# Altium PCB STM32F103C8T6_PCB.PcbDoc (part 1 of 2)
Units mm, origin at the board's own origin, x right, y up, seen from the top; angles counter-clockwise.
Board outline 40 x 65.43 mm, 2 copper layers (Top Layer, Bottom Layer); 38 components, 50 nets, 176 pads, 35 vias.
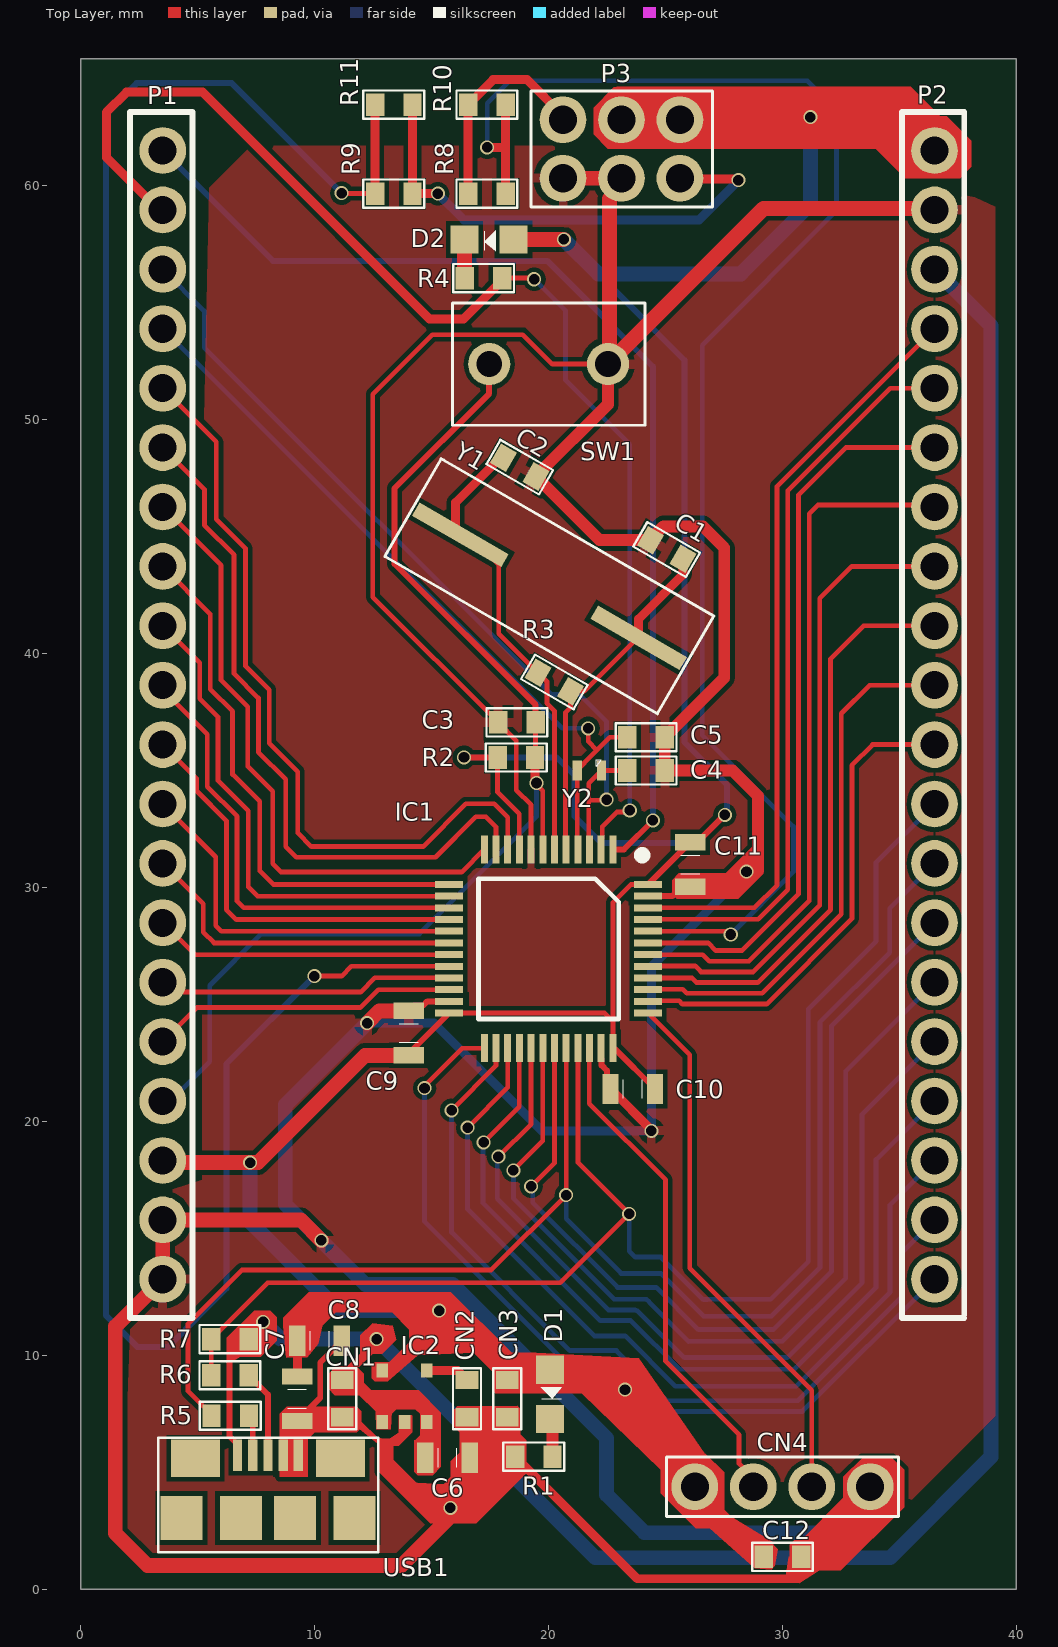
[diagram p0: Top Layer view]
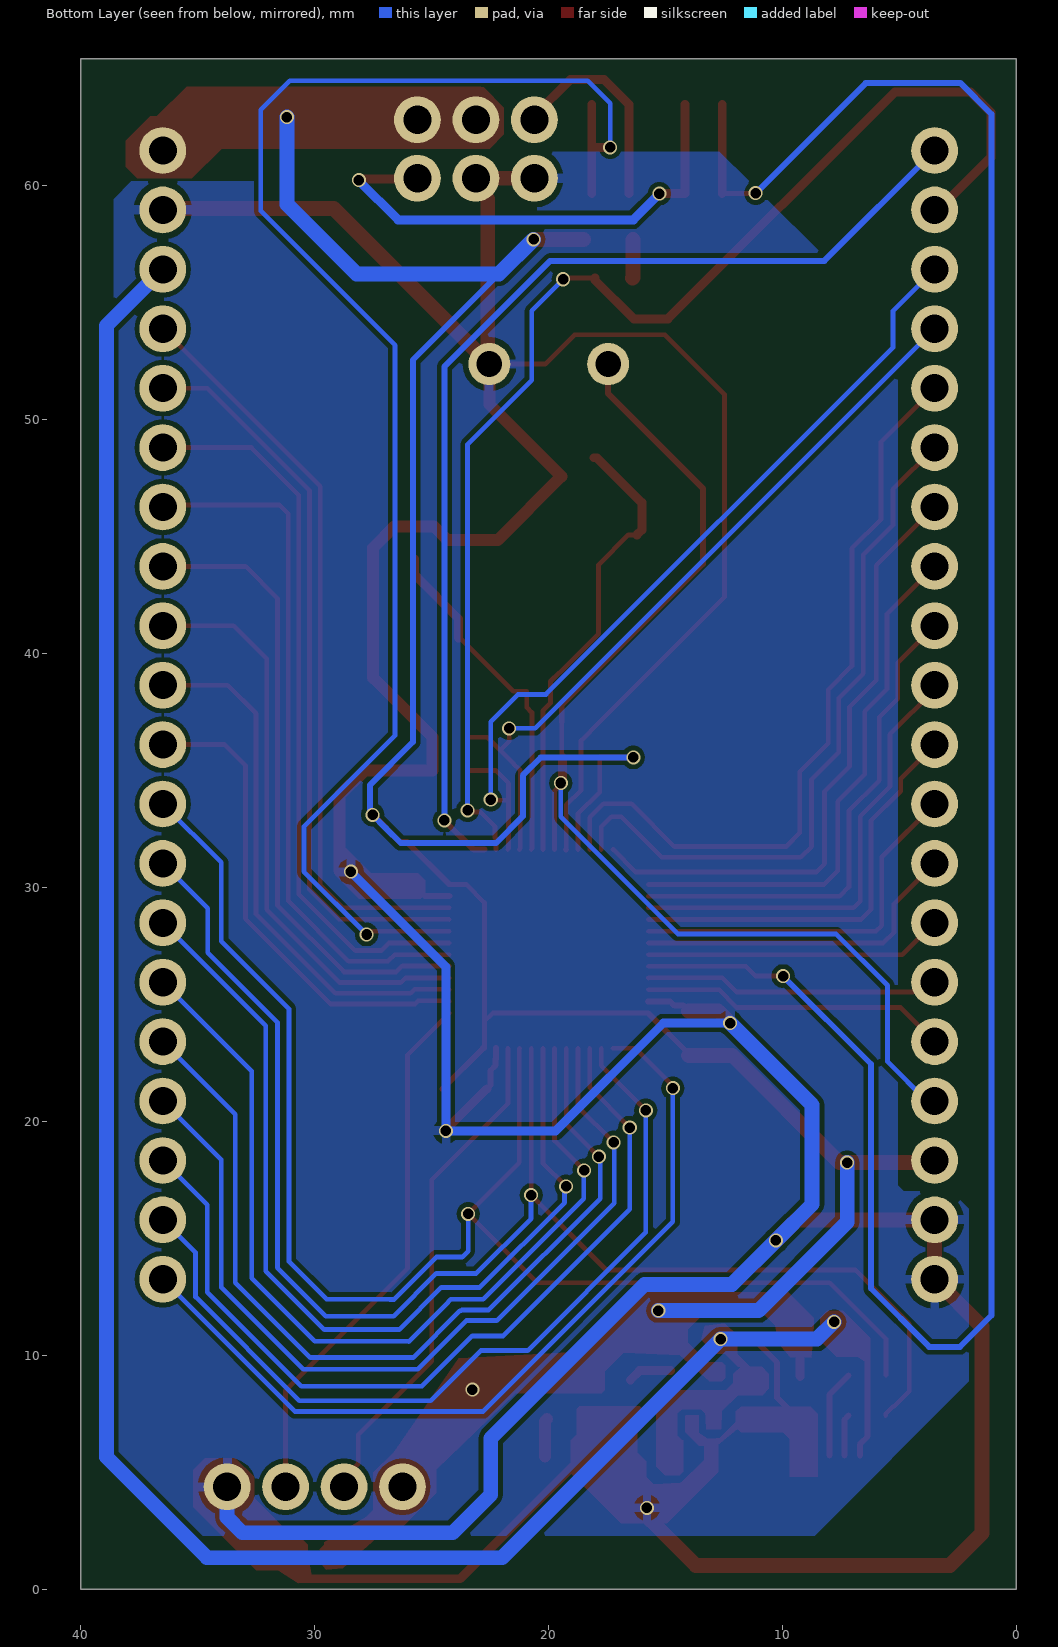
[diagram p1: Bottom Layer view, seen from below]
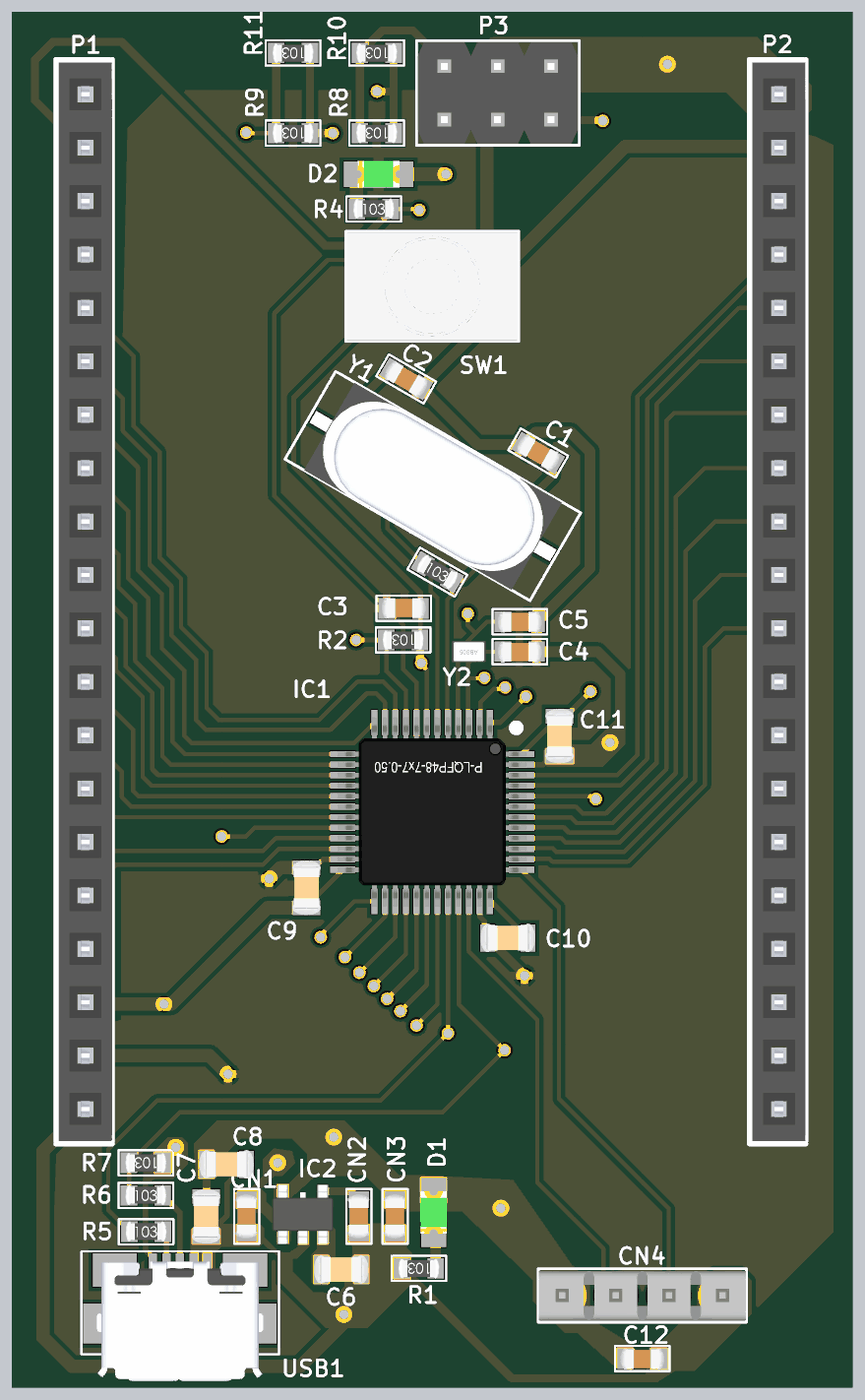
[diagram p2: 3D render of the assembled board from above, using the file's embedded part models]

## Layer stack, top to bottom
Top Solder: solder mask 0.0254, Solder Resist, Dk 3.5
Top Layer: signal copper 0.0356
Dielectric 1: dielectric 0.32, FR-4, Dk 4.8
Bottom Layer: signal copper 0.0356
Bottom Solder: solder mask 0.0254, Solder Resist, Dk 3.5

## Board outline
0,0 0,65.43 40.005,65.43 40.005,0

## Design rules (kind name [scope] priority, off if disabled: settings)
Clearance [All] p1: gap=0.203 ignorepadtopadclearanceinfootprint=TRUE except(0.229: Arc-Hole Track-Hole SMDPad-Hole THPad-Hole Via-Hole Fill-Hole Poly-Hole Region-Hole; 0.254: Arc-Arc Arc-Track Arc-THPad Arc-Via Arc-Text Track-Track Track-THPad Track-Via Track-Text SMDPad-Via SMDPad-Text THPad-Via THPad-Text Via-Via Via-Text Fill-Text Poly-Text Region-Text Text-Text Text-Hole)
DiffPairsRouting [All] p1: maxlimit=0.254 minlimit=0.254 mostfreqgap=0.254 toplayer_minwidth=0.407 toplayer_maxwidth=0.407 toplayer_prefwidth=0.407 bottomlayer_minwidth=0.407 bottomlayer_maxwidth=0.407 bottomlayer_prefwidth=0.407 impedanceprofiledriven=TRUE impedanceprofileid={79735D76-20AD-48B5-84A6-73A93A1C253D} impedanceprofilevalue=90.000000 maxuncoupledlength=12.7
MinimumSolderMaskSliver [All] p1: minsoldermaskwidth=0.127
PlaneClearance [All] p1: clearance=0.762
PlaneConnect [All] p1: planeconnectstyle=Relief reliefexpansion=0.381 reliefentries=4 reliefconductorwidth=0.381 reliefairgap=0.254
PolygonConnect [All] p1: connectstyle=Relief reliefconductorwidth=0.381 reliefentries=4 polygonreliefangle="90 Angle" airgapwidth=0.254
RoutingVias [All] p1: holewidth=0.3 width=0.5 viastyle="Through Hole" minholewidth=0.25 minwidth=0.4 maxholewidth=0.5 maxwidth=1
SMDToCorner [All] p1: distance=50000
SMDToPlane [All] p1: distance=50000
SilkToSilkClearance [All] p1 off: silktosilkclearance=0
SilkToSolderMaskClearance [IsPad] p1 off: minsilkscreentomaskgap=0.127 clearancetoexposedcopper=TRUE
SolderMaskExpansion [All] p1: expansion=0.102 istentingtop=FALSE
Width [All] p1: maxlimit=1.778 minlimit=0.203 preferedwidth=0.279 minimp=50.000000 maximp=50.000000 favimp=50.000000
24 further rules are at their usual default settings.

## Components (designator, comment, footprint, x,y, rotation, side; value= is the part's Value field where it differs from the comment)
C1 "CAP CER 20PF 50V C0G/NP0 0603" 0603_CAP 25.044,44.45 r330 top
C2 "CAP CER 20PF 50V C0G/NP0 0603" 0603_CAP 18.763,47.974 r150 top
C3 "CAP CER 10nF 50V X7R 0603" 0603_CAP 18.644,37.059 r0 top
C4 "CAP CER 20PF 50V C0G/NP0 0603" 0603_CAP 24.168,35.001 r180 top
C5 "CAP CER 20PF 50V C0G/NP0 0603" 0603_CAP 24.168,36.424 r180 top
C6 "CAP CER 1UF 0805" CAP_0805 15.672,5.618 r180 top
C7 "CAP CER 1UF 0805" CAP_0805 9.246,8.142 r90 top
C8 "CAP CER 100uf MLCC" CAP_0805 10.211,10.617 r180 top
C9 "CAP CER 100uf MLCC" CAP_0805 14.021,23.774 r270 top
C10 "CAP CER 100uf MLCC" CAP_0805 23.597,21.387 r0 top
C11 "CAP CER 100uf MLCC" CAP_0805 26.06,30.988 r90 top
C12 "CAP CER 10nF 50V X7R 0603" 0603_CAP 30,1.38 r180 top
CN1 "C0603 0.1uf" 0603_CAP 11.176,8.142 r90 top
CN2 "C0603 0.1uf" 0603_CAP 16.51,8.142 r90 top
CN3 "C0603 0.1uf" 0603_CAP 18.237,8.142 r90 top
CN4 "CONN HDR STRIP SOLDER 4POS GOLD" "4 PIN KONNEKTOR PIN" 30,4.38 r0 top
D1 "LED GREEN CLEAR CHIP SMD" 0805_LED_GREEN 20.066,8.331 r270 top
D2 "LED GREEN CLEAR CHIP SMD" 0805_LED_GREEN 17.45,57.709 r180 top
IC1 "IC MCU 32BIT 64KB FLASH 48LQFP" LQFP48 20,27.38 r180 top
IC2 "IC REG LINEAR 3.3V 300MA SOT23-5" SOT23-5 13.843,8.242 r180 top
P1 "CONN SIL HDR MALE PIN 20POS TIN" 20pin1x20_header_connector 3.5,37.38 r270 top
P2 "CONN SIL HDR MALE PIN 20POS TIN" 20pin1x20_header_connector 36.5,37.38 r270 top
P3 "header3x2" HEADER3X2 23.114,61.575 r180 top
R1 "100R" 0603_RES 19.366,5.668 r180 top
R2 "RES 10K OHM 0.5% 1/10W 0603" 0603_RES 18.618,35.56 r180 top
R3 "RES 560K OHM 5% 1/10W 0603" 0603_RES 20.244,38.786 r330 top
R4 "100R" 0603_RES 17.221,56.058 r0 top
R5 "*RES 20 OHM 5% 1/10W 0603" 0603_RES 6.388,7.417 r0 top
R6 "*RES 20 OHM 5% 1/10W 0603" 0603_RES 6.375,9.144 r0 top
R7 "RES 4.7K OHM 5% 1/10W 0603" 0603_RES 6.375,10.693 r180 top
R8 "RES 220K OHM 5% 1/10W 0603" 0603_RES 17.361,59.669 r180 top
R9 "RES 220K OHM 5% 1/10W 0603" 0603_RES 13.381,59.669 r180 top
R10 "RES 220K OHM 5% 1/10W 0603" 0603_RES 17.361,63.475 r180 top
R11 "RES 220K OHM 5% 1/10W 0603" 0603_RES 13.381,63.475 r180 top
SW1 "push button switch" PUSH_BUTTON 20,52.38 r0 top
USB1 "CONN RCPT USB2.0 MICRO B SMD R/A" "MICRO B USB2.0 SMD R/A" 8,4.38 r0 top
Y1 "CRYSTAL 8.0000MHZ 18PF SMD" "USX SMD T_8MHZ CRYSTAL" 20.041,42.875 r150 top
Y2 "CRYSTAL 32.7680KHZ 12.5PF SMD" "2-SMD_CRYSTAL 32.7680KHZ" 21.742,35.004 r180 top

## Footprints (in the part's own frame and the unit in brackets; to place one, negate y for a bottom-side part, rotate by r counter-clockwise, add the part's x,y. Pads: shape width x height; smd on the part's side, far side on the other; paste and mask are expansions set on the pad)
"2-SMD_CRYSTAL 32.7680KHZ" [mm]
  rect 0.4x0.86 smd mask+0.05: 1(-0.52,0) 2(0.52,0)
  silkscreen extent -0.51,-0.46 -0.3,-0.19, body extent -0.8,-0.5 0.8,0.5, height 0.5
"4 PIN KONNEKTOR PIN" [mm]
  round 2 hole 1.2 mask+0.102: 1(-3.75,0) 2(-1.25,0) 3(1.25,0) 4(3.75,0)
  silkscreen extent -4.95,-1.27 4.95,1.27, body extent -4.93,-1.17 4.93,1.17, height 10.43
20pin1x20_header_connector [mm]
  round 2 hole 1.2 mask+0.102: 1(-24.13,0) 2(-21.59,0) 3(-19.05,0) 4(-16.51,0) 5(-13.97,0) 6(-11.43,0) 7(-8.89,0) 8(-6.35,0) 9(-3.81,0) 10(-1.27,0) 11(1.27,0) 12(3.81,0) 13(6.35,0) 14(8.89,0) 15(11.43,0) 16(13.97,0) 17(16.51,0) 18(19.05,0) 19(21.59,0) 20(24.13,0)
  silkscreen extent -25.78,-1.4 25.78,1.27, body extent -25.65,-1.27 25.65,1.27, height 8.69
0603_CAP [mil]
  rect 31x38 smd mask+1.97: 1(-31.5,0) 2(31.5,0)
  silkscreen extent -51,-24 51,24, body extent -41,-20 41,21, height 31
0603_RES [mil]
  rect 31x38 smd mask+1.97: 1(-31.5,0) 2(31.5,0)
  silkscreen extent -51,-24 51,24, body extent -39,-19 39,20, height 17
0805_LED_GREEN [mm]
  rect 1.2x1.2 smd mask+0.05: 1(1.05,0) 2(-1.05,0)
  silkscreen extent -0.3,-0.4 0.2,0.5, body extent -1,-0.62 1,0.63, height 1.1
CAP_0805 [mm]
  rect 0.7x1.3 smd mask+0.05: 1(-0.95,0) 2(0.95,0)
  silkscreen extent -0.4,-0.4 0.4,0.4, body extent -1.3,-0.68 1.3,0.68, height 0.9
HEADER3X2 [mm]
  round 2 hole 1.2 mask+0.102: 1(-2.5,-1.25) 2(0,-1.25) 3(2.5,-1.25) 4(-2.5,1.25) 5(0,1.25) 6(2.5,1.25)
  silkscreen extent -3.89,-2.49 3.86,2.49, body extent -3.81,-2.41 3.81,2.41, height 8.49
LQFP48 [mm] "7 x 7 mm"
  rect 0.3x1.2 smd mask+0.05: 1(-2.75,-4.25) 2(-2.25,-4.25) 3(-1.75,-4.25) 4(-1.25,-4.25) 5(-0.75,-4.25) 6(-0.25,-4.25) 7(0.25,-4.25) 8(0.75,-4.25) 9(1.25,-4.25) 10(1.75,-4.25) 11(2.25,-4.25) 12(2.75,-4.25) 25(2.75,4.25) 26(2.25,4.25) 27(1.75,4.25) 28(1.25,4.25) 29(0.75,4.25) 30(0.25,4.25) 31(-0.25,4.25) 32(-0.75,4.25) 33(-1.25,4.25) 34(-1.75,4.25) 35(-2.25,4.25) 36(-2.75,4.25)
  rect 1.2x0.3 smd mask+0.05: 13(4.25,-2.75) 14(4.25,-2.25) 15(4.25,-1.75) 16(4.25,-1.25) 17(4.25,-0.75) 18(4.25,-0.25) 19(4.25,0.25) 20(4.25,0.75) 21(4.25,1.25) 22(4.25,1.75) 23(4.25,2.25) 24(4.25,2.75) 37(-4.25,2.75) 38(-4.25,2.25) 39(-4.25,1.75) 40(-4.25,1.25) 41(-4.25,0.75) 42(-4.25,0.25) 43(-4.25,-0.25) 44(-4.25,-0.75) 45(-4.25,-1.25) 46(-4.25,-1.75) 47(-4.25,-2.25) 48(-4.25,-2.75)
  silkscreen extent -4.1,-4.1 3,3, body extent -4.5,-4.5 4.5,4.5, height 1.43
"MICRO B USB2.0 SMD R/A" [mm]
  rect 0.4x1.35 smd mask+0.05: 1(-1.3,1.338) 2(-0.65,1.338) 3(0,1.338) 4(0.65,1.338) 5(1.3,1.338)
  rect 2.1x1.6 smd mask+0.05: 6(-3.1,1.213) 7(3.1,1.213)
  rect 1.8x1.9 smd mask+0.05: 8(-3.7,-1.338) 9(3.7,-1.338) 10(-1.15,-1.338) 11(1.15,-1.338)
  silkscreen extent -4.69,-2.8 4.71,2.1, body extent -3.96,-4.06 3.96,1.61, height 2.7
PUSH_BUTTON [mm]
  round 1.8 hole 1.1 mask+0.05: 1(-2.54,0) 2(2.54,0)
  silkscreen extent -4.11,-2.62 4.11,2.62, body extent -4.06,-2.54 4.07,2.54, height 19.1
SOT23-5 [mm]
  rect 0.5x0.6 smd mask+0.05: 1(0.95,1.1) 2(0,1.1) 3(-0.95,1.1) 4(-0.95,-1.1) 5(0.95,-1.1)
  body extent -1.45,-1.4 1.45,1.4, height 1.2
"USX SMD T_8MHZ CRYSTAL" [mm]
  rect 4.4x0.65 smd mask+0.05: 1(-4.4,0) 2(4.4,0)
  silkscreen extent -6.72,-2.41 6.74,2.41, body extent -6.6,-2.39 6.6,2.41, height 4.43

## Part data
C1 C2 C4 C5: Capacitance=20pF, Case Code (Metric)=1608, Case Code (Imperial)=0603, Dielectric=C0G, Manufacturer=Samsung, Manufacturer Part Number=CL10C200JB8NNNC, Max Operating Temperature=125°C, Min Operating Temperature=-55°C, Package Quantity=1, Supplier Part Number 1=1276-1187-1-ND, Temperature Coefficient=300ppm/°C, Tolerance=5%, Voltage=50V, Case/Package=0603, Category="Ceramic Capacitors", ComponentLink1Description=https://datasheet.ciiva.com/26877/getdatasheetpartid-640634-26877974.pdf?src-supplier=Verical, ComponentLink1URL=https://datasheet.ciiva.com/26877/getdatasheetpartid-640634-26877974.pdf?src-supplier=Verical, ComponentLink2Description=https://datasheet.ciiva.com/26310/mlcc-catalogdownload2013-eng-26310315.pdf?src-supplier=Distrelec, ComponentLink2URL=https://datasheet.ciiva.com/26310/mlcc-catalogdownload2013-eng-26310315.pdf?src-supplier=Distrelec, Construction=Flat, Depth=0.8mm, Designer=Dogukan, Height=0.8mm, Length=1.6mm, Mount="Surface Mount", Packaging="Tape and Reel", Pricing 1="1=0,1, 10=0,044, 50=0,0238, 100=0,0194, 500=0,01386, 1000=0,01089 (USD)", Radiation Hardening=No, RoHS=Yes, RoHS Compliant=Yes, Series=CL, Stock 1=464918, Supplier 1=Digi-Key, Thickness=0.035inch, Voltage Rating=50V, Width=0.031inch
C3 C12: "Cap Ceramic 0.01uF 50V X7R 5% SMD 0603 125C Paper T/R", Capacitance=10nF, Case Code (Metric)=1608, Case Code (Imperial)=0603, Dielectric=X7R, Manufacturer=Yageo, Manufacturer Part Number=CC0603JPX7R9BB103, Max Operating Temperature=125°C, Min Operating Temperature=-55°C, Supplier Part Number 1=13-CC0603JPX7R9BB103CT-ND, Tolerance=5%, Voltage Rating (DC)=50V, Case/Package=0603, Category="Ceramic Capacitors", ComponentLink1Description=http://www.mouser.com/ds/2/447/UPY-GPHC_X7R_6.3V-to-50V_10-595240.pdf?src-supplier=Mouser, ComponentLink1URL=http://www.mouser.com/ds/2/447/UPY-GPHC_X7R_6.3V-to-50V_10-595240.pdf?src-supplier=Mouser, Designer=Dogukan, Halogen Free="Halogen Free", Lead Free="Lead Free", Packaging="Tape and Reel", Pricing 1="1=0,1, 10=0,048, 50=0,0262, 100=0,0214, 500=0,0153, 1000=0,01203, 2500=0,01093, 5000=0,01006 (USD)", RoHS=Yes, RoHS Compliant=Yes, Stock 1=51472, Supplier 1=Digi-Key, Termination=SMD/SMT, Weight=7.1E-05oz
C6 C7: "CAP CER 1UF 50V X7R 0805", Capacitance=1uF, Case Code (Metric)=2012, Case Code (Imperial)=0805, Dielectric=X7R, Manufacturer=Samsung, Manufacturer Part Number=CL21B105KBFNNNE, Max Operating Temperature=125°C, Min Operating Temperature=-55°C, Package Quantity=1, Supplier Part Number 1=1276-1029-1-ND, Tolerance=10%, Voltage=50V, Case/Package=0805, Category="Ceramic Capacitors", ComponentLink1Description=https://datasheet.ciiva.com/25800/cl21b105kbfnnne-25800291.pdf?src-supplier=Digi-Key, ComponentLink1URL=https://datasheet.ciiva.com/25800/cl21b105kbfnnne-25800291.pdf?src-supplier=Digi-Key, Construction=Flat, Depth=1.25mm, Designer=Dogukan, Height=1.25mm, Length=2mm, Mount="Surface Mount", Packaging="Tape and Reel", Pricing 1="1=0,11, 10=0,079, 50=0,045, 100=0,0373, 500=0,02616, 1000=0,02165 (USD)", Radiation Hardening=No, RoHS=Yes, RoHS Compliant=Yes, Series=CL, Stock 1=145892, Supplier 1=Digi-Key, Thickness=0.053inch, Voltage Rating=50V, Width=0.049inch
C8 C9 C10 C11: "Cap 100UF 4VDC Z6S 20% SMD 0805 Embossed Tape", Capacitance=100uF, Dielectric=X6S, Manufacturer=Murata, Manufacturer Part Number=GRM21BC80G107ME15K, Supplier Part Number 1=490-GRM21BC80G107ME15KCT-ND, Tolerance=20%, Voltage Rating (DC)=4V, Category="Ceramic Capacitors", Designer=Dogukan, Length=2mm, Pricing 1="1=0,94, 10=0,715, 50=0,5938, 100=0,5114, 500=0,3959, 1000=0,34092, 2500=0,31892, 5000=0,30243 (USD)", RoHS=Yes, RoHS Compliant=Yes, Stock 1=76129, Supplier 1=Digi-Key, Thickness=1.25mm, Width=1.25mm
CN1 CN2 CN3: "Multilayer Ceramic Capacitors (MLCC) - SMD/SMT 50volts 0.1uF X7R 10%", Capacitance=100nF, Case/Package=0603, Dielectric=X7R, Manufacturer=KEMET, Manufacturer Part Number=C0603C104K5RACTU, Max Operating Temperature=125°C, Min Operating Temperature=-55°C, Supplier Part Number 1=399-C0603C104K5RAC7867CT-ND, Tolerance=10%, Voltage=50V, Category="Ceramic Capacitors", Designer=Dogukan, Length=0.063inch, Mount="Surface Mount", Packaging="Tape and Reel", Pricing 1="1=0,11, 10=0,078, 50=0,0424, 100=0,0346, 500=0,02474, 1000=0,01944 (USD)", RoHS=Yes, RoHS Compliant=Yes, Series="SMD Comm X7R", Stock 1=9369813, Supplier 1=Digi-Key, Thickness=0.034inch, Voltage Rating=50V, Width=0.031inch
CN4: library part "KONNEKTOR 4POS", "Headers & Wire Housings Low Profile RT Angle Solder Cup Header", Manufacturer=Mill-Max, Manufacturer Part Number=380-10-104-10-003000, Supplier Part Number 1=ED10093-ND, Category=Connectors, ComponentLink1Description=https://www.mill-max.com/assets/pdfs/047.2.PDF?src-supplier=Digi-Key, ComponentLink1URL=https://www.mill-max.com/assets/pdfs/047.2.PDF?src-supplier=Digi-Key, ComponentLink2Description=https://datasheet.octopart.com/380-10-104-10-003000-Mill-Max-datasheet-155418866.pdf?src-supplier=Sager+Electronics, ComponentLink2URL=https://datasheet.octopart.com/380-10-104-10-003000-Mill-Max-datasheet-155418866.pdf?src-supplier=Sager+Electronics, Designer=Dogukan, Pricing 1="1=6,26, 10=5,684, 100=5,0076, 500=4,25644, 1000=3,6305 (USD)", RoHS=No, Stock 1=609, Supplier 1=Digi-Key
D1 D2: "Green 569nm LED Indication - Discrete 2.1V 0805 (2012 Metric)", Case Code (Metric)=2012, Case Code (Imperial)=0805, Color=Green, Forward Current=30mA, Forward Voltage=2.1V, Lens Color=Colorless, Manufacturer="Vishay Lite-On", Manufacturer Part Number=LTST-C171GKT, Max Operating Temperature=85°C, Min Operating Temperature=-55°C, Package Quantity=3000, Power Dissipation=100mW, Reverse Voltage=5V, Supplier Part Number 1=160-1423-1-ND, Test Current=10mA, Case/Package=0805, Category=LEDs, ComponentLink1Description=https://datasheet.ciiva.com/11773/0900766b80dc0296-11773991.pdf?src-supplier=Rs, ComponentLink1URL=https://datasheet.ciiva.com/11773/0900766b80dc0296-11773991.pdf?src-supplier=Rs, ComponentLink2Description=https://datasheet.ciiva.com/2110/ltst-c171gkt-2110000.pdf?src-supplier=Digi-Key, ComponentLink2URL=https://datasheet.ciiva.com/2110/ltst-c171gkt-2110000.pdf?src-supplier=Digi-Key, ComponentLink3Description=https://datasheet.ciiva.com/12400/lite-on-ltst-c171gkt-190133-12400647.pdf?src-supplier=Mouser, ComponentLink3URL=https://datasheet.ciiva.com/12400/lite-on-ltst-c171gkt-190133-12400647.pdf?src-supplier=Mouser, ComponentLink4Description=https://datasheet.ciiva.com/2110/ltst-c171gkt-2110001.pdf?src-supplier=Digi-Key, ComponentLink4URL=https://datasheet.ciiva.com/2110/ltst-c171gkt-2110001.pdf?src-supplier=Digi-Key, ComponentLink5Description=https://datasheet.ciiva.com/2110/ltst-c171gkt-2110002.pdf?src-supplier=Digi-Key, ComponentLink5URL=https://datasheet.ciiva.com/2110/ltst-c171gkt-2110002.pdf?src-supplier=Digi-Key, ComponentLink6Description=https://datasheet.ciiva.com/16396/ltst-c171gkt-16396549.pdf?src-supplier=Future+Electronics, ComponentLink6URL=https://datasheet.ciiva.com/16396/ltst-c171gkt-16396549.pdf?src-supplier=Future+Electronics, Depth=1.25mm, Designer=Dogukan, Dominant Wavelength=569nm, Height=0.9mm, Lead Free="Lead Free", Length=2mm, Lens Size=1.25mm, Lens Style=Flat,Diffused,Colorless,Rectangular,Clear, Lens Transparency=Clear, Luminous Intensity=12mcd, Mount="Surface Mount", Number of Elements=1, Number of LEDs=1, Number of Pins=2, Packaging="Tape and Reel", Power Rating=100mW, Pricing 1="1=0,26, 10=0,143, 100=0,0663, 500=0,0612, 1000=0,04794 (USD)", Radiation Hardening=No, RoHS=Yes, RoHS Compliant=Yes, Series=-, Stock 1=213944, Supplier 1=Digi-Key, Viewing Angle=130°, Wavelength=585nm, Width=1.25mm, Illumination Color=Green
IC1: library part STM32F103C8T6, "ARM Cortex-M3 STM32 F1 Microcontroller 32-Bit 72MHz 64kB FLASH LQFP48 STM32F103C8T6", Manufacturer=STMicroelectronics, Supplier Part Number 1=497-6063-ND, Category=Microcontrollers, ComponentLink1Description=https://datasheet.ciiva.com/8054/1730126-8054942.pdf?src-supplier=Element14, ComponentLink1URL=https://datasheet.ciiva.com/8054/1730126-8054942.pdf?src-supplier=Element14, ComponentLink2Description=https://datasheet.ciiva.com/14100/pustm-arm-microcont-stm32f103-en-14100508.pdf?src-supplier=Distrelec, ComponentLink2URL=https://datasheet.ciiva.com/14100/pustm-arm-microcont-stm32f103-en-14100508.pdf?src-supplier=Distrelec, Designer=Dogukan, Manufacturer Part Number=STM32F103C8T6, Pricing 1="1=6,42, 25=5,5256, 100=4,7979, 500=4,17798, 2500=3,5672 (USD)", RoHS=Yes, Supplier 1=Digi-Key
IC2: library part "Voltage Regulator_5V->3.3V", "IC REG LDO 3.3V 0.3A SOT23-5", Manufacturer=Richtek, Manufacturer Part Number=RT9193-33GB, Supplier Part Number 1=1028-1014-1-ND, Category="Voltage Regulator", ComponentLink1Description=https://datasheet.ciiva.com/2046/3d3futf-83fb3frfm5mtkzlte2lnbkzg3d3d3f3d-2046896.pdf?src-supplier=Digi-Key, ComponentLink1URL=https://datasheet.ciiva.com/2046/3d3futf-83fb3frfm5mtkzlte2lnbkzg3d3d3f3d-2046896.pdf?src-supplier=Digi-Key, ComponentLink2Description=https://datasheet.ciiva.com/28652/1782157-28652989.pdf?src-supplier=Element14, ComponentLink2URL=https://datasheet.ciiva.com/28652/1782157-28652989.pdf?src-supplier=Element14, Designer=Dogukan, Pricing 1="1=0,55, 10=0,468, 25=0,4368, 100=0,3494, 250=0,32448, 500=0,27456, 1000=0,21216 (USD)", RoHS=Yes, Stock 1=15060, Supplier 1=Digi-Key
P1 P2: library part header_20pin, "2.54mm (0.1\") Pitch SIL Vertical Through Connect Header Strip, tin (hi-temp mould), 20 contacts", Manufacturer=Harwin, Manufacturer Part Number=D01-9922046, Supplier Part Number 1=952-1900-ND, Category="Headers and Wire Housings", ComponentLink1Description=https://datasheet.ciiva.com/9479/d01-992-9479968.pdf?src-supplier=Avnet, ComponentLink1URL=https://datasheet.ciiva.com/9479/d01-992-9479968.pdf?src-supplier=Avnet, ComponentLink2Description=https://datasheet.ciiva.com/11747/0900766b8078dcb7-11747631.pdf?src-supplier=Rs, ComponentLink2URL=https://datasheet.ciiva.com/11747/0900766b8078dcb7-11747631.pdf?src-supplier=Rs, ComponentLink3Description=https://datasheet.ciiva.com/7639/111680-7639719.pdf?src-supplier=Element14, ComponentLink3URL=https://datasheet.ciiva.com/7639/111680-7639719.pdf?src-supplier=Element14, ComponentLink4Description=https://datasheet.ciiva.com/6783/d01-992-6783401.pdf?src-supplier=Digi-Key, ComponentLink4URL=https://datasheet.ciiva.com/6783/d01-992-6783401.pdf?src-supplier=Digi-Key, Designer=Dogukan, Pricing 1="1=4,9, 100=3,1066, 500=2,6656, 2500=2,37161 (USD)", RoHS=Yes, Stock 1=1140, Supplier 1=Digi-Key
R1 R4: library part RES_100R_0603, "Res Thick Film 0603 100 Ohm 1% 1/10W ±100ppm/°C Molded SMD Paper T/R", Case Code (Metric)=1608, Case Code (Imperial)=0603, Manufacturer=Yageo, Manufacturer Part Number=RC0603FR-07100RL, Max Operating Temperature=155°C, Max Power Dissipation=100mW, Min Operating Temperature=-55°C, Resistance Tolerance=1%, Resistor Type="Thick Film", Supplier Part Number 1=311-100HRDKR-ND, Temperature Coefficient=100ppm/°C, Voltage Rating=50V, Case/Package=0603, Category="Chip SMD Resistors", ComponentLink1Description=https://datasheet.ciiva.com/7660/38590-7660788.pdf?src-supplier=Element14, ComponentLink1URL=https://datasheet.ciiva.com/7660/38590-7660788.pdf?src-supplier=Element14, ComponentLink2Description=https://datasheet.ciiva.com/11808/0900766b80f96399-11808280.pdf?src-supplier=Rs, ComponentLink2URL=https://datasheet.ciiva.com/11808/0900766b80f96399-11808280.pdf?src-supplier=Rs, ComponentLink3Description=https://datasheet.ciiva.com/22747/443971-22747518.pdf?src-supplier=Element14, ComponentLink3URL=https://datasheet.ciiva.com/22747/443971-22747518.pdf?src-supplier=Element14, ComponentLink4Description=https://datasheet.ciiva.com/46440/1868787-46440890.pdf?src-supplier=Element14, ComponentLink4URL=https://datasheet.ciiva.com/46440/1868787-46440890.pdf?src-supplier=Element14, ComponentLink5Description=https://datasheet.ciiva.com/7746/1738695-7746238.pdf?src-supplier=Element14, ComponentLink5URL=https://datasheet.ciiva.com/7746/1738695-7746238.pdf?src-supplier=Element14, ComponentLink6Description=https://datasheet.ciiva.com/7746/1738695-7746237.pdf?src-supplier=Element14, ComponentLink6URL=https://datasheet.ciiva.com/7746/1738695-7746237.pdf?src-supplier=Element14, Construction=Rectangular, Depth=0.8mm, Designer=Dogukan, Features="Moisture Resistant", Height=0.45mm, Lead Free="Lead Free", Length=1.6mm, Military Standard=Not, Number of Pins=2, Number of Terminations=2, Packaging="Tape and Reel", Power Rating=100mW, Pricing 1="1=0,1, 10=0,018, 50=0,0106, 100=0,0088, 500=0,00592, 1000=0,00505 (USD)", Reach SVHC Compliant=Unknown, Resistance=100R, RoHS=Yes, RoHS Compliant=Yes, Series=RC, Size Code=0603, Stock 1=7267655, Supplier 1=Digi-Key, Technology="THICK FILM", Termination=SMD/SMT, Tolerance=1%, Voltage Rating (DC)=50V, Width=0.8mm
R2: "Res Thin Film 0603 10K Ohm 0.5% 1/10W ±25ppm/°C Molded SMD Paper T/R", Case Code (Metric)=1608, Case Code (Imperial)=0603, Manufacturer=Yageo, Manufacturer Part Number=RT0603DRD0710KL, Max Operating Temperature=155°C, Max Power Dissipation=100mW, Min Operating Temperature=-55°C, Resistance=10kR, Supplier Part Number 1=311-10KDCT-ND, Temperature Coefficient=25ppm/°C, Tolerance=0.5%, Voltage Rating (DC)=50V, Case/Package=0603, Category="Chip SMD Resistors", ComponentLink1Description=http://www.yageo.com/documents/recent/PYu-RT_1-to-0.01_RoHS_L_9.pdf?src-supplier=Digi-Key, ComponentLink1URL=http://www.yageo.com/documents/recent/PYu-RT_1-to-0.01_RoHS_L_9.pdf?src-supplier=Digi-Key, ComponentLink2Description=http://www.yageo.com/documents/recent/PYu-RT_1-to-0.05_RoHS_L_(4).pdf?src-supplier=Future+Electronics, ComponentLink2URL=http://www.yageo.com/documents/recent/PYu-RT_1-to-0.05_RoHS_L_(4).pdf?src-supplier=Future+Electronics, Designer=Dogukan, Lead Free="Lead Free", Number of Terminations=2, Packaging="Cut Tape", Power Rating=100mW, Pricing 1="1=0,18, 10=0,151, 100=0,0592, 500=0,0358, 1000=0,02478, 2500=0,02271 (USD)", RoHS=Yes, RoHS Compliant=Yes, Series=RT, Size Code=0603, Stock 1=1584873, Supplier 1=Digi-Key, Width=800um
R3: "Res Thick Film 0603 560K Ohm 5% 0.1W(1/10W) ±100ppm/C Molded SMD Paper T/R", Case Code (Metric)=1608, Case Code (Imperial)=0603, Manufacturer=Yageo, Manufacturer Part Number=RC0603JR-07560KL, Max Operating Temperature=155°C, Max Power Dissipation=100mW, Min Operating Temperature=-55°C, Package Quantity=1, Resistance=560kR, Resistance Tolerance=5%, Resistor Type="Thick Film", Supplier Part Number 1=311-560KGRCT-ND, Temperature Coefficient=100ppm/°C, Voltage Rating=75V, Voltage Rating (DC)=50V, Case/Package=0603, Category="Chip SMD Resistors", ComponentLink1Description=https://datasheet.ciiva.com/2453/pyu-r-int-thick-7-2453056.pdf?src-supplier=Digi-Key, ComponentLink1URL=https://datasheet.ciiva.com/2453/pyu-r-int-thick-7-2453056.pdf?src-supplier=Digi-Key, ComponentLink2Description=https://datasheet.ciiva.com/2453/pyu-r-int-thick-7-2453057.pdf?src-supplier=Digi-Key, ComponentLink2URL=https://datasheet.ciiva.com/2453/pyu-r-int-thick-7-2453057.pdf?src-supplier=Digi-Key, ComponentLink3Description=https://datasheet.ciiva.com/2453/pyu-r-int-thick-7-2453055.pdf?src-supplier=Digi-Key, ComponentLink3URL=https://datasheet.ciiva.com/2453/pyu-r-int-thick-7-2453055.pdf?src-supplier=Digi-Key, Designer=Dogukan, Features="Moisture Resistant", Height=0.022inch, Lead Free="Lead Free", Length=0.063inch, Number of Pins=2, Number of Terminations=2, Packaging="Tape and Reel", Power Rating=100mW, Pricing 1="1=0,1, 10=0,014, 50=0,0088, 100=0,0073, 500=0,00486, 1000=0,00415 (USD)", Reach SVHC Compliant=Unknown, RoHS=Yes, RoHS Compliant=Yes, Series=RC, Stock 1=503891, Supplier 1=Digi-Key, Technology="THICK FILM", Termination=SMD/SMT, Tolerance=5%, Weight=7.1E-05oz, Width=0.8mm, Working Voltage=75V
R5 R6: library part "RES 20 OHM 5% 1/10W 0603", "Res Thick Film 0603 20 Ohm 5% 1/10W +/-100ppm/ßC Molded SMD Paper T/R", Manufacturer=Yageo, Manufacturer Part Number=RC0603JR-0720RL, Supplier Part Number 1=311-20GRCT-ND, Category="Chip SMD Resistors", ComponentLink1Description=https://datasheet.ciiva.com/2453/pyu-r-int-thick-7-2453211.pdf?src-supplier=Digi-Key, ComponentLink1URL=https://datasheet.ciiva.com/2453/pyu-r-int-thick-7-2453211.pdf?src-supplier=Digi-Key, ComponentLink2Description=https://datasheet.ciiva.com/2453/pyu-r-int-thick-7-2453212.pdf?src-supplier=Digi-Key, ComponentLink2URL=https://datasheet.ciiva.com/2453/pyu-r-int-thick-7-2453212.pdf?src-supplier=Digi-Key, ComponentLink3Description=https://datasheet.ciiva.com/2453/pyu-r-int-thick-7-2453213.pdf?src-supplier=Digi-Key, ComponentLink3URL=https://datasheet.ciiva.com/2453/pyu-r-int-thick-7-2453213.pdf?src-supplier=Digi-Key, Designer=Dogukan, Pricing 1="1=0,1, 10=0,014, 50=0,0088, 100=0,0073, 500=0,00486, 1000=0,00415 (USD)", R=20R, RoHS=Yes, Stock 1=1380627, Supplier 1=Digi-Key
R7: "Res General Purpose Thick Film 0603 4.7k Ohm 5% 1/10W ±100ppm/°C Molded Paper T/R", Case Code (Metric)=1608, Case Code (Imperial)=0603, Manufacturer=Yageo, Manufacturer Part Number=RC0603JR-074K7L, Max Operating Temperature=155°C, Max Power Dissipation=100mW, Min Operating Temperature=-55°C, Resistance=4.7kR, Resistance Tolerance=5%, Resistor Type="Thick Film", Supplier Part Number 1=311-4.7KGRCT-ND, Temperature Coefficient=100ppm/°C, Voltage Rating=50V, Case/Package=0603, Category="Chip SMD Resistors", ComponentLink1Description=https://datasheet.ciiva.com/46412/443971-46412858.pdf?src-supplier=Element14, ComponentLink1URL=https://datasheet.ciiva.com/46412/443971-46412858.pdf?src-supplier=Element14, Construction=Rectangular, Depth=0.8mm, Designer=Dogukan, Features="Moisture Resistant", Lead Free="Lead Free", Length=1.6mm, Military Standard=Not, Number of Pins=2, Number of Terminations=2, Packaging="Tape and Reel", Power Rating=100mW, Pricing 1="1=0,1, 10=0,014, 50=0,0088, 100=0,0073, 500=0,00486, 1000=0,00415 (USD)", Reach SVHC Compliant=No, RoHS=Yes, RoHS Compliant=Yes, Series=RC, Size Code=0603, Stock 1=7404081, Supplier 1=Digi-Key, Termination=SMD/SMT, Tolerance=5%, Voltage Rating (DC)=50V, Width=0.8mm
R8 R9 R10 R11: "Res Thick Film 0603 220K Ohm 5% 0.1W(1/10W) ±100ppm/C Pad SMD T/R", Case Code (Metric)=1608, Case Code (Imperial)=0603, Manufacturer=Yageo, Manufacturer Part Number=RC0603JR-07220KL, Max Operating Temperature=155°C, Max Power Dissipation=100mW, Min Operating Temperature=-55°C, Package Quantity=1, Resistance=220kR, Resistance Tolerance=5%, Resistor Type="Thick Film", Supplier Part Number 1=311-220KGRCT-ND, Temperature Coefficient=100ppm/°C, Voltage Rating=50V, Case/Package=0603, Category="Chip SMD Resistors", ComponentLink1Description=https://datasheet.ciiva.com/2452/pyu-r-int-thick-7-2452925.pdf?src-supplier=Digi-Key, ComponentLink1URL=https://datasheet.ciiva.com/2452/pyu-r-int-thick-7-2452925.pdf?src-supplier=Digi-Key, ComponentLink2Description=https://datasheet.ciiva.com/2452/pyu-r-int-thick-7-2452923.pdf?src-supplier=Digi-Key, ComponentLink2URL=https://datasheet.ciiva.com/2452/pyu-r-int-thick-7-2452923.pdf?src-supplier=Digi-Key, ComponentLink3Description=https://datasheet.ciiva.com/2452/pyu-r-int-thick-7-2452924.pdf?src-supplier=Digi-Key, ComponentLink3URL=https://datasheet.ciiva.com/2452/pyu-r-int-thick-7-2452924.pdf?src-supplier=Digi-Key, Construction=Rectangular, Depth=0.8mm, Designer=Dogukan, Features="Moisture Resistant", Height=0.022inch, Lead Free="Lead Free", Length=0.063inch, Military Standard=Not, Number of Pins=2, Number of Terminations=2, Packaging="Tape and Reel", Power Rating=100mW, Pricing 1="1=0,1, 10=0,014, 50=0,0088, 100=0,0073, 500=0,00486, 1000=0,00415 (USD)", Reach SVHC Compliant=No, RoHS=Yes, RoHS Compliant=Yes, Series=RC, Size Code=0603, Stock 1=1084932, Supplier 1=Digi-Key, Termination=SMD/SMT, Tolerance=5%, Voltage Rating (DC)=50V, Width=0.031inch
SW1: library part push_button
USB1: "CONN USB MICRO B RECPT SMT R/A", Color=Black, Current Rating=1.8A, Flammability Rating="UL94 V-0", Manufacturer="Amphenol ICC / FCI", Manufacturer Part Number=10118192-0001LF, Max Operating Temperature=85°C, Max Voltage Rating (AC)=100V, Min Operating Temperature=-55°C, Package Quantity=1400, Supplier Part Number 1=609-4613-1-ND, Insulation Resistance=1GR, Category="USB Connectors", ComponentLink1Description=http://uk.rs-online.com/webdocs/1450/0900766b814507ee.pdf?src-supplier=Rs, ComponentLink1URL=http://uk.rs-online.com/webdocs/1450/0900766b814507ee.pdf?src-supplier=Rs, ComponentLink2Description=http://www.amphenol-icc.com/media/wysiwyg/files/drawing/10118192.pdf?src-supplier=Digi-Key, ComponentLink2URL=http://www.amphenol-icc.com/media/wysiwyg/files/drawing/10118192.pdf?src-supplier=Digi-Key, ComponentLink3Description=http://www.farnell.com/datasheets/2366786.pdf?src-supplier=Farnell, ComponentLink3URL=http://www.farnell.com/datasheets/2366786.pdf?src-supplier=Farnell, ComponentLink4Description=https://cdn.amphenol-icc.com/media/wysiwyg/files/documentation/datasheet/inputoutput/io_usb_micro.pdf?src-supplier=Verical, ComponentLink4URL=https://cdn.amphenol-icc.com/media/wysiwyg/files/documentation/datasheet/inputoutput/io_usb_micro.pdf?src-supplier=Verical, ComponentLink5Description=https://cdn.amphenol-icc.com/media/wysiwyg/files/documentation/datasheet/inputoutput/io_usb_micro.pdf?src-supplier=Arrow+Electronics, ComponentLink5URL=https://cdn.amphenol-icc.com/media/wysiwyg/files/documentation/datasheet/inputoutput/io_usb_micro.pdf?src-supplier=Arrow+Electronics, ComponentLink6Description=https://cdn.amphenol-icc.com/media/wysiwyg/files/documentation/datasheet/inputoutput/io_usb_micro.pdf?src-supplier=Avnet, ComponentLink6URL=https://cdn.amphenol-icc.com/media/wysiwyg/files/documentation/datasheet/inputoutput/io_usb_micro.pdf?src-supplier=Avnet, ComponentLink7Description=http://www.farnell.com/cad/1935767.pdf?src-supplier=Element14, ComponentLink7URL=http://www.farnell.com/cad/1935767.pdf?src-supplier=Element14, ComponentLink8Description=https://cdn.amphenol-icc.com/media/wysiwyg/files/documentation/datasheet/inputoutput/io_usb_micro.pdf?src-supplier=Allied+Electronics, ComponentLink8URL=https://cdn.amphenol-icc.com/media/wysiwyg/files/documentation/datasheet/inputoutput/io_usb_micro.pdf?src-supplier=Allied+Electronics, ComponentLink9Description=http://www.farnell.com/datasheets/2366786.pdf?src-supplier=Newark, ComponentLink9URL=http://www.farnell.com/datasheets/2366786.pdf?src-supplier=Newark, ComponentLink10Description=https://cdn.amphenol-icc.com/media/wysiwyg/files/documentation/datasheet/inputoutput/io_usb_micro.pdf?src-supplier=Mouser, ComponentLink10URL=https://cdn.amphenol-icc.com/media/wysiwyg/files/documentation/datasheet/inputoutput/io_usb_micro.pdf?src-supplier=Mouser, ComponentLink11Description=https://cdn.amphenol-icc.com/media/wysiwyg/files/documentation/datasheet/inputoutput/io_usb_micro.pdf?src-supplier=Freelance+Electronics, ComponentLink11URL=https://cdn.amphenol-icc.com/media/wysiwyg/files/documentation/datasheet/inputoutput/io_usb_micro.pdf?src-supplier=Freelance+Electronics, ComponentLink12Description=https://cdn.amphenol-icc.com/media/wysiwyg/files/documentation/datasheet/inputoutput/io_usb_micro.pdf?src-supplier=Heilind+Electronics, ComponentLink12URL=https://cdn.amphenol-icc.com/media/wysiwyg/files/documentation/datasheet/inputoutput/io_usb_micro.pdf?src-supplier=Heilind+Electronics, ComponentLink13Description=https://cdn.amphenol-icc.com/media/wysiwyg/files/documentation/datasheet/inputoutput/io_usb_micro.pdf?src-supplier=TME, ComponentLink13URL=https://cdn.amphenol-icc.com/media/wysiwyg/files/documentation/datasheet/inputoutput/io_usb_micro.pdf?src-supplier=TME, ComponentLink14Description=https://cdn.amphenol-icc.com/media/wysiwyg/files/documentation/datasheet/inputoutput/io_usb_micro.pdf?src-supplier=TTI, ComponentLink14URL=https://cdn.amphenol-icc.com/media/wysiwyg/files/documentation/datasheet/inputoutput/io_usb_micro.pdf?src-supplier=TTI, ComponentLink15Description=https://cdn.amphenol-icc.com/media/wysiwyg/files/documentation/datasheet/inputoutput/io_usb_micro.pdf?src-supplier=NAC+Semi, ComponentLink15URL=https://cdn.amphenol-icc.com/media/wysiwyg/files/documentation/datasheet/inputoutput/io_usb_micro.pdf?src-supplier=NAC+Semi, ComponentLink16Description=https://cdn.amphenol-icc.com/media/wysiwyg/files/documentation/datasheet/inputoutput/io_usb_micro.pdf?src-supplier=SOS+electronic, ComponentLink16URL=https://cdn.amphenol-icc.com/media/wysiwyg/files/documentation/datasheet/inputoutput/io_usb_micro.pdf?src-supplier=SOS+electronic, Connector Type=USB,Receptacle, Contact Material="Copper Alloy", Contact Plating=Gold, Depth=5.57mm, Designer=Dogukan, Features=Shielded, Gender=Receptacle, Housing Material=Polymer, Length=7.86mm, Mount="Surface Mount,Horizontal", Number of Contacts=5, Number of Pins=5, Number of Ports=1, Orientation="Right Angle", Packaging="Tape and Reel", Pitch=0.65mm, Pricing 1="1=0,46, 10=0,404, 25=0,3696, 50=0,3478, 100=0,3334, 250=0,30436, 500=0,28988 (USD)", Radiation Hardening=No, Reach SVHC Compliant=No, RoHS=No, Series=-, Stock 1=122306, Supplier 1=Digi-Key, Termination=Solder, USB Standard="USB 2.0", Voltage Rating=100V
Y1: "Crystal 8MHz ±30ppm (Tol) ±50ppm (Stability) 18pF FUND 60Ohm 2-Pin HC-49/USX SMD T/R", Manufacturer="ECS International", Manufacturer Part Number=ECS-80-18-5PX-TR, Supplier Part Number 1=XC1271CT-ND, Category="8MHz Crystal", ComponentLink1Description=https://datasheet.ciiva.com/852/csm-7x-852380.pdf?src-supplier=Digi-Key, ComponentLink1URL=https://datasheet.ciiva.com/852/csm-7x-852380.pdf?src-supplier=Digi-Key, ComponentLink2Description=https://datasheet.ciiva.com/852/csm-7x-852381.pdf?src-supplier=Digi-Key, ComponentLink2URL=https://datasheet.ciiva.com/852/csm-7x-852381.pdf?src-supplier=Digi-Key, ComponentLink3Description=https://datasheet.ciiva.com/852/csm-7x-852382.pdf?src-supplier=Digi-Key, ComponentLink3URL=https://datasheet.ciiva.com/852/csm-7x-852382.pdf?src-supplier=Digi-Key, Designer=Dogukan, Pricing 1="1=0,31, 10=0,259, 50=0,2328, 100=0,2068, 500=0,1965 (USD)", RoHS=Yes, Stock 1=115816, Supplier 1=Digi-Key
Y2: "Crystal 0.032768MHz ±20ppm (Tol) 12.5pF Flexural 90000Ohm 2-Pin CSMD T/R", Case/Package=CSMD, ESR (Equivalent Series Resistance)=90kR, Frequency=32.768kHz, Frequency Tolerance=20ppm, Load Capacitance=12.5pF, Manufacturer=Abracon, Manufacturer Part Number=ABS05-32.768KHZ-T, Max Operating Temperature=85°C, Min Operating Temperature=-40°C, Operating Frequency="32.768 kHz", Package Quantity=3000, Supplier Part Number 1=535-11899-1-ND, Category=Crystals, ComponentLink1Description=https://datasheet.ciiva.com/23810/abs05-23810480.pdf?src-supplier=Newark, ComponentLink1URL=https://datasheet.ciiva.com/23810/abs05-23810480.pdf?src-supplier=Newark, ComponentLink2Description=https://datasheet.ciiva.com/6728/abs05-6728949.pdf?src-supplier=Digi-Key, ComponentLink2URL=https://datasheet.ciiva.com/6728/abs05-6728949.pdf?src-supplier=Digi-Key, ComponentLink3Description=https://datasheet.ciiva.com/6728/abs05-6728950.pdf?src-supplier=Digi-Key, ComponentLink3URL=https://datasheet.ciiva.com/6728/abs05-6728950.pdf?src-supplier=Digi-Key, ComponentLink4Description=https://datasheet.ciiva.com/16411/abs05-16411149.pdf?src-supplier=Future+Electronics, ComponentLink4URL=https://datasheet.ciiva.com/16411/abs05-16411149.pdf?src-supplier=Future+Electronics, Depth=1mm, Designer=Dogukan, Height=0.5mm, Lead Free="Lead Free", Length=1.6mm, Mount="Surface Mount", Number of Pins=2, Packaging="Tape and Reel", Pricing 1="1=0,75, 10=0,628, 50=0,565, 100=0,5022, 500=0,4771, 1000=0,40177 (USD)", Radiation Hardening=No, Reach SVHC Compliant=No, RoHS=Yes, RoHS Compliant=Yes, Series=ABS05, Series Resistance=90kR, Stock 1=336355, Supplier 1=Digi-Key, Termination=2-SMD/SMT, Tolerance=20ppm, Width=1mm
P3: Designer=Dogukan

## Via types
v1: diameter 0.6, hole 0.45, Top Layer to Bottom Layer, 35 vias

## Nets (pads, with @x,y where several pads share a name; then routed paths per layer and width w, separated by ;. In a path a pad name is that pad's centre, name@x,y a point inside that pad or via, vN(x,y) a via of type N, cw(c..) or ccw(c..) an arc to the next point about the centre after c; other vN are vias at no path point)
+5: C6.2 CN1.2 IC2.1 IC2.3 P2.3 R7.1 USB1.1 | length 94.4
  Top Layer w0.254: USB1.1 6.7,6.192 6.363,6.53 6.363,9.881 R7.1
  Top Layer w0.508: C6.2 C6.2@14.793,5.69
  Bottom Layer w0.635: v1(7.798,11.43) 8.534,10.693 v1(12.649,10.693) 21.996,1.346 34.604,1.346 38.913,5.655 38.913,54.017 P2.3
BOOT0: IC1.44 R8.1 R10.1 | length 66.3
  Top Layer w0.203: IC1.44 27.648,28.13 v1(27.788,27.991)
  Top Layer w0.381: v1(17.374,61.646) 18.087,61.646 18.161,61.572 ; R8.1 18.161,61.572 ; R10.1 18.161,61.572
  Bottom Layer w0.203: v1(17.374,61.646) 17.374,63.525 18.339,64.491 31.064,64.491 32.309,63.246 32.309,58.928 26.568,53.188 26.568,36.5 30.465,32.603 30.465,30.668 v1(27.788,27.991)
BOOT1: IC1.20 R9.2 R11.2 | length 96.8
  Top Layer w0.203: v1(9.982,26.213) 11.151,26.213 11.568,26.63 IC1.20 ; v1(11.151,59.69) 11.171,59.669 R9.2
  Top Layer w0.381: R9.2 R11.2
  Bottom Layer w0.254: v1(9.982,26.213) 6.223,22.454 6.223,12.852 3.734,10.363 2.413,10.363 1.067,11.709 1.067,63.068 2.388,64.389 6.452,64.389 v1(11.151,59.69)
GND: C1.1 C2.1 C3.1 C4.1 C5.1 C6.1 C7.1 C8.1 C9.1 C10.1 C11.1 C12.1 CN1.1 CN2.1 CN3.1 CN4.4 IC1.8 IC1.23 IC1.35 IC1.47 IC2.2 P1.19 P1.20 P2.2 P3.5 P3.6 R1.2 SW1.2 USB1.4 USB1.5 | length 237.3
  Top Layer w0.203: IC1.8 19.25,33.532 18.618,34.164 18.618,36.284 C3.1 12.485,42.417 12.485,51.089 15.031,53.636 18.896,53.636 20.152,52.38 SW1.2
  Top Layer w0.254: C7.1 10.236,8.183 10.236,9.693 C8.1 ; C9.1 14.244,24.947 14.63,24.947 14.813,25.13 IC1.23 ; IC1.8 IC1.8@19.26,31.62 ; IC1.35 22.25,22.677 22.27,22.657 22.27,22.393 22.489,22.174 22.489,21.544 C10.1 ; IC1.47 25.287,29.63 25.472,29.815 25.837,29.815 C11.1
  Top Layer w0.381: R1.2 23.79,0.445 30.67,0.445 30.683,0.457 ; C10.1 24.393,19.64 v1(24.393,19.592)
  Top Layer w0.508: C6.1 C6.1@16.672,5.668 ; SW1.2@22.606,52.446 SW1.2 22.54,50.658 C2.1 22.181,44.85 C1.1 24.351,44.883 24.91,45.441 26.594,45.441 27.508,44.526 27.508,38.964 C5.1 C4.1 27.864,35.001 28.949,33.916 28.949,30.701 28.285,30.038 C11.1
  Top Layer w0.635: v1(10.286,14.909) 9.405,15.79 P1.19 P1.20 1.473,11.223 1.473,2.388 2.845,1.016 13.716,1.016 17.424,4.724 17.424,5.309 ; v1(12.243,24.206) 12.761,24.724 C9.1 ; P3.6 P3.5 23.114,59.956 22.606,59.448 22.606,52.446 29.19,59.03 36.44,59.03 P2.2
  Bottom Layer w0.381: v1(12.243,24.206) 15.093,24.206 19.708,19.592 v1(24.393,19.592) 24.393,26.607 v1(28.461,30.675)
  Bottom Layer w0.635: v1(12.243,24.206) 8.738,20.701 8.738,16.457 v1(10.286,14.909) 12.165,13.03 15.9,13.03 22.479,6.452 22.479,4.039 24.105,2.413 33.096,2.413 33.75,3.067 CN4.4
  other v1: 15.799,3.48
NetCN2_2: CN2.2 IC2.4 | length 1.9
  Top Layer w0.381: IC2.4 16.11,9.342 CN2.2
NetD1_1: D1.1 R1.1 | length 1.7
  Top Layer w0.508: D1.1 20.166,7.181 R1.1
NetD2_1: D2.1 R4.1 | length 1.7
  Top Layer w0.635: D2.1 16.4,56.079 R4.1
NetP3_3: P3.3 R8.2 R10.2 | length 9.1
  Top Layer w0.381: R8.2 R10.2 17.628,64.541 19.081,64.541 20.614,63.008 P3.3
NetP3_4: P3.4 R9.1 R11.1 | length 21.5
  Top Layer w0.381: R11.1 R9.1 14.186,59.665 v1(15.265,59.665) ; P3.4 25.652,60.287 28.08,60.287 v1(28.118,60.249)
  Bottom Layer w0.381: v1(15.265,59.665) 16.383,58.547 26.441,58.547 28.118,60.223 v1(28.118,60.249)
NetR5_2: R5.2 USB1.2 | length 1.8
  Top Layer w0.254: R5.2 7.35,7.255 USB1.2
NetR6_2: R6.2 USB1.3 | length 3.8
  Top Layer w0.254: R6.2 8,8.319 USB1.3
NRST: C3.2 IC1.7 P1.17 R2.1 SW1.1 | length 49.4
  Top Layer w0.203: R2.1 19.444,35.585 C3.2 ; v1(19.482,34.468) 19.482,34.4 19.75,34.132 IC1.7
  Top Layer w0.254: SW1.1 17.46,51.115 13.411,47.066 13.411,43.84 19.444,37.808 C3.2
  Top Layer w0.381: R2.1 19.418,34.591 19.482,34.527 v1(19.482,34.468)
  Bottom Layer w0.203: P1.17 3.827,20.87 5.512,22.555 5.512,25.81 7.718,28.016 14.478,28.016 19.482,33.02 v1(19.482,34.468)
OSC_IN: C1.2 IC1.5 R3.2 Y1.1 | length 14.9
  Top Layer w0.203: IC1.5 20.717,31.663 20.717,37.482 20.937,37.701 R3.2 21.518,38.386 23.808,40.675 Y1.1
  Top Layer w0.381: Y1.1 23.851,41.479 25.737,43.366 C1.2
OSC_OUT: C2.2 IC1.6 R3.1 Y1.2 | length 19.6
  Top Layer w0.203: Y1.2 16.591,45.075 17.871,43.795 17.871,40.854 19.539,39.186 R3.1 19.929,38.808 19.929,37.881 20.25,37.56 IC1.6
  Top Layer w0.381: Y1.2 16.019,45.286 16.019,46.454 17.939,48.374 C2.2
PA0: IC1.10 P1.5 | length 33
  Top Layer w0.203: P1.5 5.791,49.059 5.791,45.745 7.036,44.501 7.036,39.472 8.052,38.456 8.052,36.17 9.271,34.95 9.271,32.334 9.855,31.75 14.63,31.75 16.459,33.579 17.67,33.579 18.25,32.999 IC1.10
PA1: IC1.11 P1.6 | length 30.3
  Top Layer w0.203: P1.6 5.283,47.027 5.283,45.491 6.553,44.221 6.553,39.141 7.595,38.1 7.595,35.789 8.763,34.62 8.763,31.75 9.22,31.293 15.164,31.293 16.891,33.02 17.323,33.02 17.75,32.593 IC1.11
PA2: IC1.12 P1.7 | length 26.8
  Top Layer w0.203: P1.7 5.994,43.776 5.994,38.862 7.137,37.719 7.137,35.179 8.204,34.112 8.204,31.013 8.56,30.658 16.278,30.658 IC1.12
PA3: IC1.13 P1.8 | length 23.1
  Top Layer w0.203: P1.8 5.537,41.693 5.537,38.481 6.49,37.529 6.49,34.836 7.645,33.68 7.645,30.709 8.224,30.13 IC1.13
PA4: IC1.14 P1.9 | length 21.4
  Top Layer w0.203: P1.9 5.08,39.61 5.08,38.075 5.867,37.287 5.867,34.569 7.163,33.274 7.163,30.023 7.556,29.63 IC1.14
PA5: IC1.15 P1.10 | length 19.7
  Top Layer w0.203: P1.10 3.5,38.461 5.41,36.551 5.41,34.315 6.68,33.045 6.68,29.413 6.963,29.13 IC1.15
PA6: IC1.16 P1.11 | length 17.9
  Top Layer w0.203: P1.11 4.953,34.657 4.953,34.126 6.223,32.856 6.223,29.058 6.651,28.63 IC1.16
PA7: IC1.17 P1.12 | length 16.2
  Top Layer w0.203: P1.12 5.766,31.304 5.766,28.372 6.008,28.13 IC1.17
PA8: IC1.29 P2.16 | length 38.4
  Top Layer w0.203: v1(17.856,18.491) 19.25,19.885 IC1.29
  Bottom Layer w0.203: v1(17.856,18.491) 17.8,18.435 17.8,16.7 22.56,11.94 23.706,11.94 23.747,11.9 23.8,11.9 25.8,9.9 30.2,9.9 33.4,13.1 33.4,20.31 P2.16
PA9: IC1.30 P2.15 | length 39
  Top Layer w0.203: v1(18.491,17.907) 19.75,19.166 IC1.30
  Bottom Layer w0.203: v1(18.491,17.907) 18.5,17.898 18.5,16.7 22.8,12.4 24.181,12.4 24.3,12.281 24.3,12.268 25.984,10.584 26,10.6 30,10.6 32.7,13.3 32.7,22.15 P2.15
PA10: IC1.31 P2.14 | length 39.8
  Top Layer w0.203: v1(19.253,17.221) 20.25,18.218 IC1.31
  Bottom Layer w0.203: v1(19.253,17.221) 19.323,17.151 19.323,16.523 22.947,12.9 24.6,12.9 26.4,11.1 29.6,11.1 32.1,13.6 32.1,24.09 P2.14
PA11: IC1.32 P2.13 R5.1 | length 62.8
  Top Layer w0.203: R5.1 5.588,7.506 5.296,7.798 5.256,7.798 4.584,8.47 4.584,11.34 6.895,13.651 17.551,13.651 v1(20.75,16.85) IC1.32
  Bottom Layer w0.203: v1(20.75,16.85) 20.753,16.847 20.753,15.847 23.1,13.5 24.8,13.5 26.627,11.673 29.527,11.673 31.6,13.747 31.6,24.237 34.582,27.218 34.582,29.112 P2.13
PA12: IC1.33 P2.12 R6.1 R7.2 | length 62.2
  Top Layer w0.203: R6.1 R7.2 7.982,13.1 20.5,13.1 v1(23.444,16.044) 21.26,18.229 21.26,23.12 IC1.33
  Bottom Layer w0.203: v1(23.444,16.044) 23.444,14.456 23.7,14.2 24.8,14.2 26.616,12.384 26.784,12.384 26.8,12.4 29.5,12.4 31.1,14 31.1,24.8 34,27.7 34,31.07 P2.12
PA15: IC1.38 P2.11 | length 20.8
  Top Layer w0.203: IC1.38 24.273,25.153 25.585,25.153 25.719,25.019 29.321,25.019 32.969,28.667 32.969,35.23 33.849,36.11 P2.11
PB0: IC1.18 P1.13 | length 14.4
  Top Layer w0.203: P1.13 5.232,29.298 5.232,28.092 5.695,27.63 IC1.18
PB1: IC1.19 P1.14 | length 12.8
  Top Layer w0.203: P1.14 3.524,28.49 4.884,27.13 IC1.19
PB3: IC1.39 P2.10 | length 22.8
  Top Layer w0.203: IC1.39 24.274,25.654 25.73,25.654 25.908,25.476 29.132,25.476 32.512,28.857 32.512,37.44 33.722,38.65 P2.10
PB4: IC1.40 P2.9 | length 24.9
  Top Layer w0.203: IC1.40 26.132,26.13 26.328,25.933 28.942,25.933 32.055,29.046 32.055,39.776 33.468,41.19 P2.9
PB5: IC1.41 P2.8 | length 27.2
  Top Layer w0.203: IC1.41 24.265,26.645 26.264,26.645 26.518,26.391 28.753,26.391 31.598,29.235 31.598,42.367 32.96,43.73 P2.8
PB6: IC1.42 P2.7 | length 30.2
  Top Layer w0.203: IC1.42 24.253,27.127 26.594,27.127 26.873,26.848 28.563,26.848 31.14,29.425 31.14,45.974 31.521,46.355 36.415,46.355 P2.7
PB7: IC1.43 P2.6 | length 31.3
  Top Layer w0.203: IC1.43 26.828,27.63 27.153,27.305 28.268,27.305 30.683,29.72 30.683,46.78 32.713,48.81 P2.6
PB8: IC1.45 P2.5 | length 31.7
  Top Layer w0.203: IC1.45 24.266,28.646 28.963,28.646 30.226,29.91 30.226,46.969 34.607,51.35 P2.5
PB9: IC1.46 P2.4 | length 32.5
  Top Layer w0.203: IC1.46 28.8,29.13 29.769,30.099 29.769,47.159 P2.4
PB10: IC1.21 P1.15 | length 12.7
  Top Layer w0.203: P1.15 3.986,25.95 4.409,25.527 11.965,25.527 12.575,26.137 15.743,26.137 IC1.21
PB11: IC1.22 P1.16 | length 13.2
  Top Layer w0.203: P1.16 4.957,24.867 11.951,24.867 12.713,25.629 15.749,25.629 IC1.22
PB12: IC1.25 P2.20 | length 36.5
  Top Layer w0.203: v1(14.694,21.422) 14.694,21.526 16.297,23.13 IC1.25
  Bottom Layer w0.203: v1(14.694,21.422) 14.694,15.706 22.8,7.6 30.85,7.6 P2.20
PB13: IC1.26 P2.19 | length 36.6
  Top Layer w0.203: v1@15.85,20.472 v1(15.85,20.474) 17.75,22.375 IC1.26
  Bottom Layer w0.203: v1(15.85,20.474) 15.85,15.25 20.9,10.2 22.9,10.2 25.043,8.057 30.661,8.057 35.1,12.497 35.1,14.39 P2.19
PB14: IC1.27 P2.18 | length 36.9
  Top Layer w0.203: v1(16.535,19.736) 18.25,21.45 IC1.27
  Bottom Layer w0.203: v1(16.535,19.736) 16.535,16.249 21.955,10.829 23.271,10.829 25.422,8.678 30.578,8.678 34.6,12.7 34.6,16.43 P2.18
PB15: IC1.28 P2.17 | length 37.5
  Top Layer w0.203: v1(17.221,19.101) 18.75,20.63 IC1.28
  Bottom Layer w0.203: v1(17.221,19.101) 17.2,19.08 17.2,16.5 22.217,11.483 23.517,11.483 25.6,9.4 30.5,9.4 34,12.9 34,18.37 P2.17
PC13: IC1.2 P1.2 R4.2 | length 55.6
  Top Layer w0.203: R4.2 19.329,56.058 v1(19.38,56.007) ; IC1.2 22.25,32.083 22.295,32.128 22.295,32.608 22.911,33.223 23.394,33.223 v1(23.47,33.299)
  Top Layer w0.381: P1.2 3.336,58.97 1.092,61.214 1.092,63.144 1.956,64.008 5.207,64.008 14.904,54.311 16.363,54.311 18.021,55.969 R4.2
  Bottom Layer w0.203: v1(19.38,56.007) 20.726,54.661 20.726,51.689 23.47,48.946 v1(23.47,33.299)
PC14: C4.2 IC1.3 P1.3 Y2.1 | length 36.7
  Top Layer w0.203: IC1.3 21.717,31.663 21.717,33.731 ; v1(22.479,33.757) 22.454,33.731 21.717,33.731 ; C4.2 22.264,35.001 Y2.1 21.717,34.459 21.717,33.731
  Bottom Layer w0.203: P1.3 5.283,54.647 5.283,53.086 20.117,38.252 21.311,38.252 22.479,37.084 v1(22.479,33.757)
PC15: C5.2 IC1.4 P1.4 Y2.2 | length 32.5
  Top Layer w0.203: IC1.4 21.222,31.658 Y2.2 21.512,35.294 21.512,35.315 22.066,35.869 ; v1(21.692,36.805) 21.692,36.244 22.066,35.869 ; C5.2 22.621,36.424 22.066,35.869
  Bottom Layer w0.203: P1.4 20.585,36.805 v1(21.692,36.805)
SWCLK: CN4.3 IC1.37 | length 23.1
  Top Layer w0.203: IC1.37 26.035,22.845 26.035,13.716 31.25,8.501 CN4.3
SWIO: CN4.2 IC1.34 | length 21.7
  Top Layer w0.203: IC1.34 21.742,23.122 21.742,20.758 25,17.5 25,9.747 28.143,6.604 28.143,5.367 28.75,4.76 CN4.2
VBAT: IC1.1 P1.1 | length 46.4
  Top Layer w0.254: IC1.1 23.223,31.63 v1(24.46,32.868)
  Bottom Layer w0.254: P1.1 8.216,56.794 19.937,56.794 24.46,52.271 v1(24.46,32.868)
VCC_3.3V: C7.2 C8.2 C9.2 C10.2 C11.2 C12.2 CN3.2 CN4.1 D1.2 D2.2 IC1.9 IC1.24 IC1.36 IC1.48 IC2.5 P1.18 P2.1 P3.1 P3.2 R2.2 | length 114.8
  Top Layer w0.203: IC1.24 22.398,24.63 22.748,24.28 ; R2.2 17.818,34.078 18.75,33.146 IC1.9 ; IC1.36 22.748,23.132 22.748,24.28 ; IC1.48 23.523,30.13 22.748,29.355 22.748,24.28
  Top Layer w0.254: C9.2 14.021,22.901 IC1.24@15.742,24.622 ; v1(16.383,35.56) R2.2 ; IC1.36@22.758,23.13 22.803,23.13 C10.2 ; IC1.48@24.26,30.138 C11.2 26.36,31.938 27.529,33.107 v1(27.532,33.107)
  Top Layer w0.381: C7.2 9.261,9.107 C8.2
  Top Layer w0.635: P1.18 3.847,17.983 4.101,18.237 v1(7.239,18.237) 7.569,18.237 12.156,22.824 C9.2 ; D2.2 v1(20.65,57.709)
  Bottom Layer w0.254: v1(16.383,35.56) 20.345,35.56 21.107,34.798 21.107,33.045 22.25,31.902 26.328,31.902 26.966,32.541 v1(27.532,33.107) ; 22.123,56.236 25.806,52.553 25.806,36.22 27.635,34.392 v1@27.635,33.071
  Bottom Layer w0.635: v1(7.239,18.237) 7.239,15.697 11.024,11.913 v1(15.316,11.913) ; v1(20.65,57.709) 22.123,56.236 28.219,56.236 31.193,59.209 v1(31.193,62.941)
  other v1: 23.266,8.534
pads on no net: USB1.6 USB1.7 USB1.8 USB1.9 USB1.10 USB1.11

## Polygon pours and split planes (outlines as drawn)
GND on Top Layer "GND_L01_P000" (solid, remove dead copper, pour order 0): 37.803,59.606 34.2,59.9 28.06,60.209 26.562,61.708 7.285,61.708 5.501,59.923 5.2,46.888 5.2,22.8 5.2,17.5 2.3,16.6 1.769,1.448 33.148,1.448 39.1,7.4 39.1,59.099 38.213,59.513
GND on Bottom Layer "GND_L02_P001" (solid, remove dead copper, pour order 1): 38.608,59.436 37.846,60.198 30.226,60.198 28.956,61.468 12.7,61.468 5.08,53.848 5.08,17.272 4.826,17.018 2.794,17.018 2.032,16.256 2.032,8.89 8.636,2.286 34.798,2.286 38.608,6.096

## Other copper
Top Layer:
  region net GND: 28.716,31.739 27.578,30.6 25.574,30.6 25.285,30.312 25.285,29.71 25.475,29.52 28.114,29.52 29.012,30.418
  region net VCC_3.3V: 22.784,64.211 21.92,63.348 21.92,62.205 22.53,61.595 33.985,61.595 35.255,60.325 37.592,60.325 38.075,60.808 38.075,61.925 37.033,62.967 36.754,62.967 35.484,64.237 22.911,64.237
  region net GND: 19.05,5.232 19.05,4.953 16.916,2.819 14.935,2.819 13.818,3.937 14.376,4.496 15.519,4.496 16.764,5.74 18.821,5.74